# Altium PCB Thermistors Board V2.PcbDoc
Units mm, origin at the board's own origin, x right, y up, seen from the top; angles counter-clockwise.
Board outline 83.25 x 83.25 mm, 2 copper layers (Top Layer, Bottom Layer); 72 components, 65 nets, 212 pads, 0 vias.
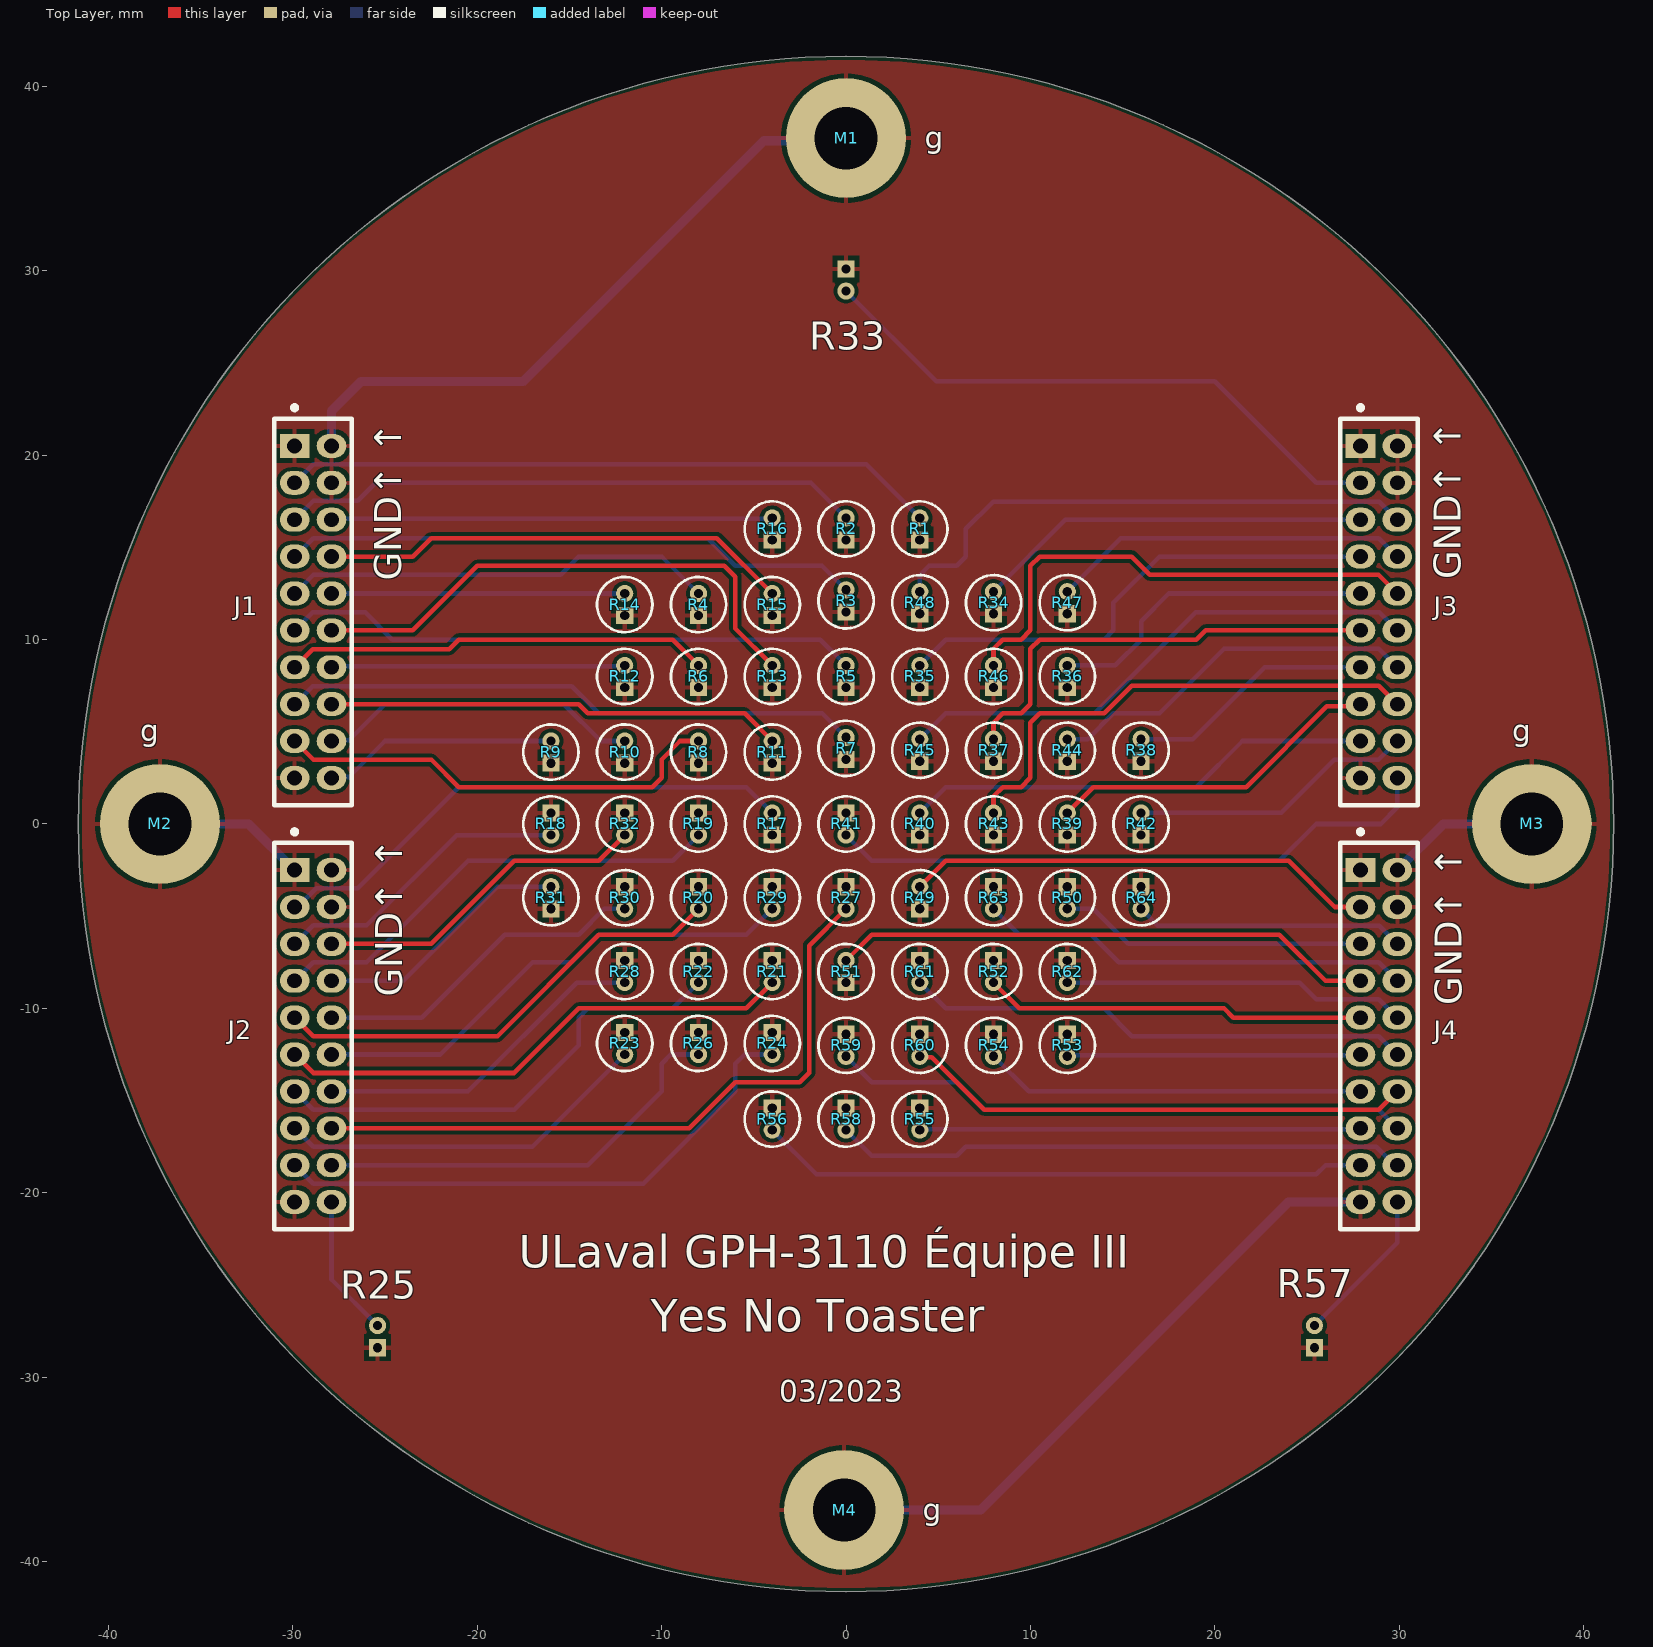
[diagram p0: Top Layer view]
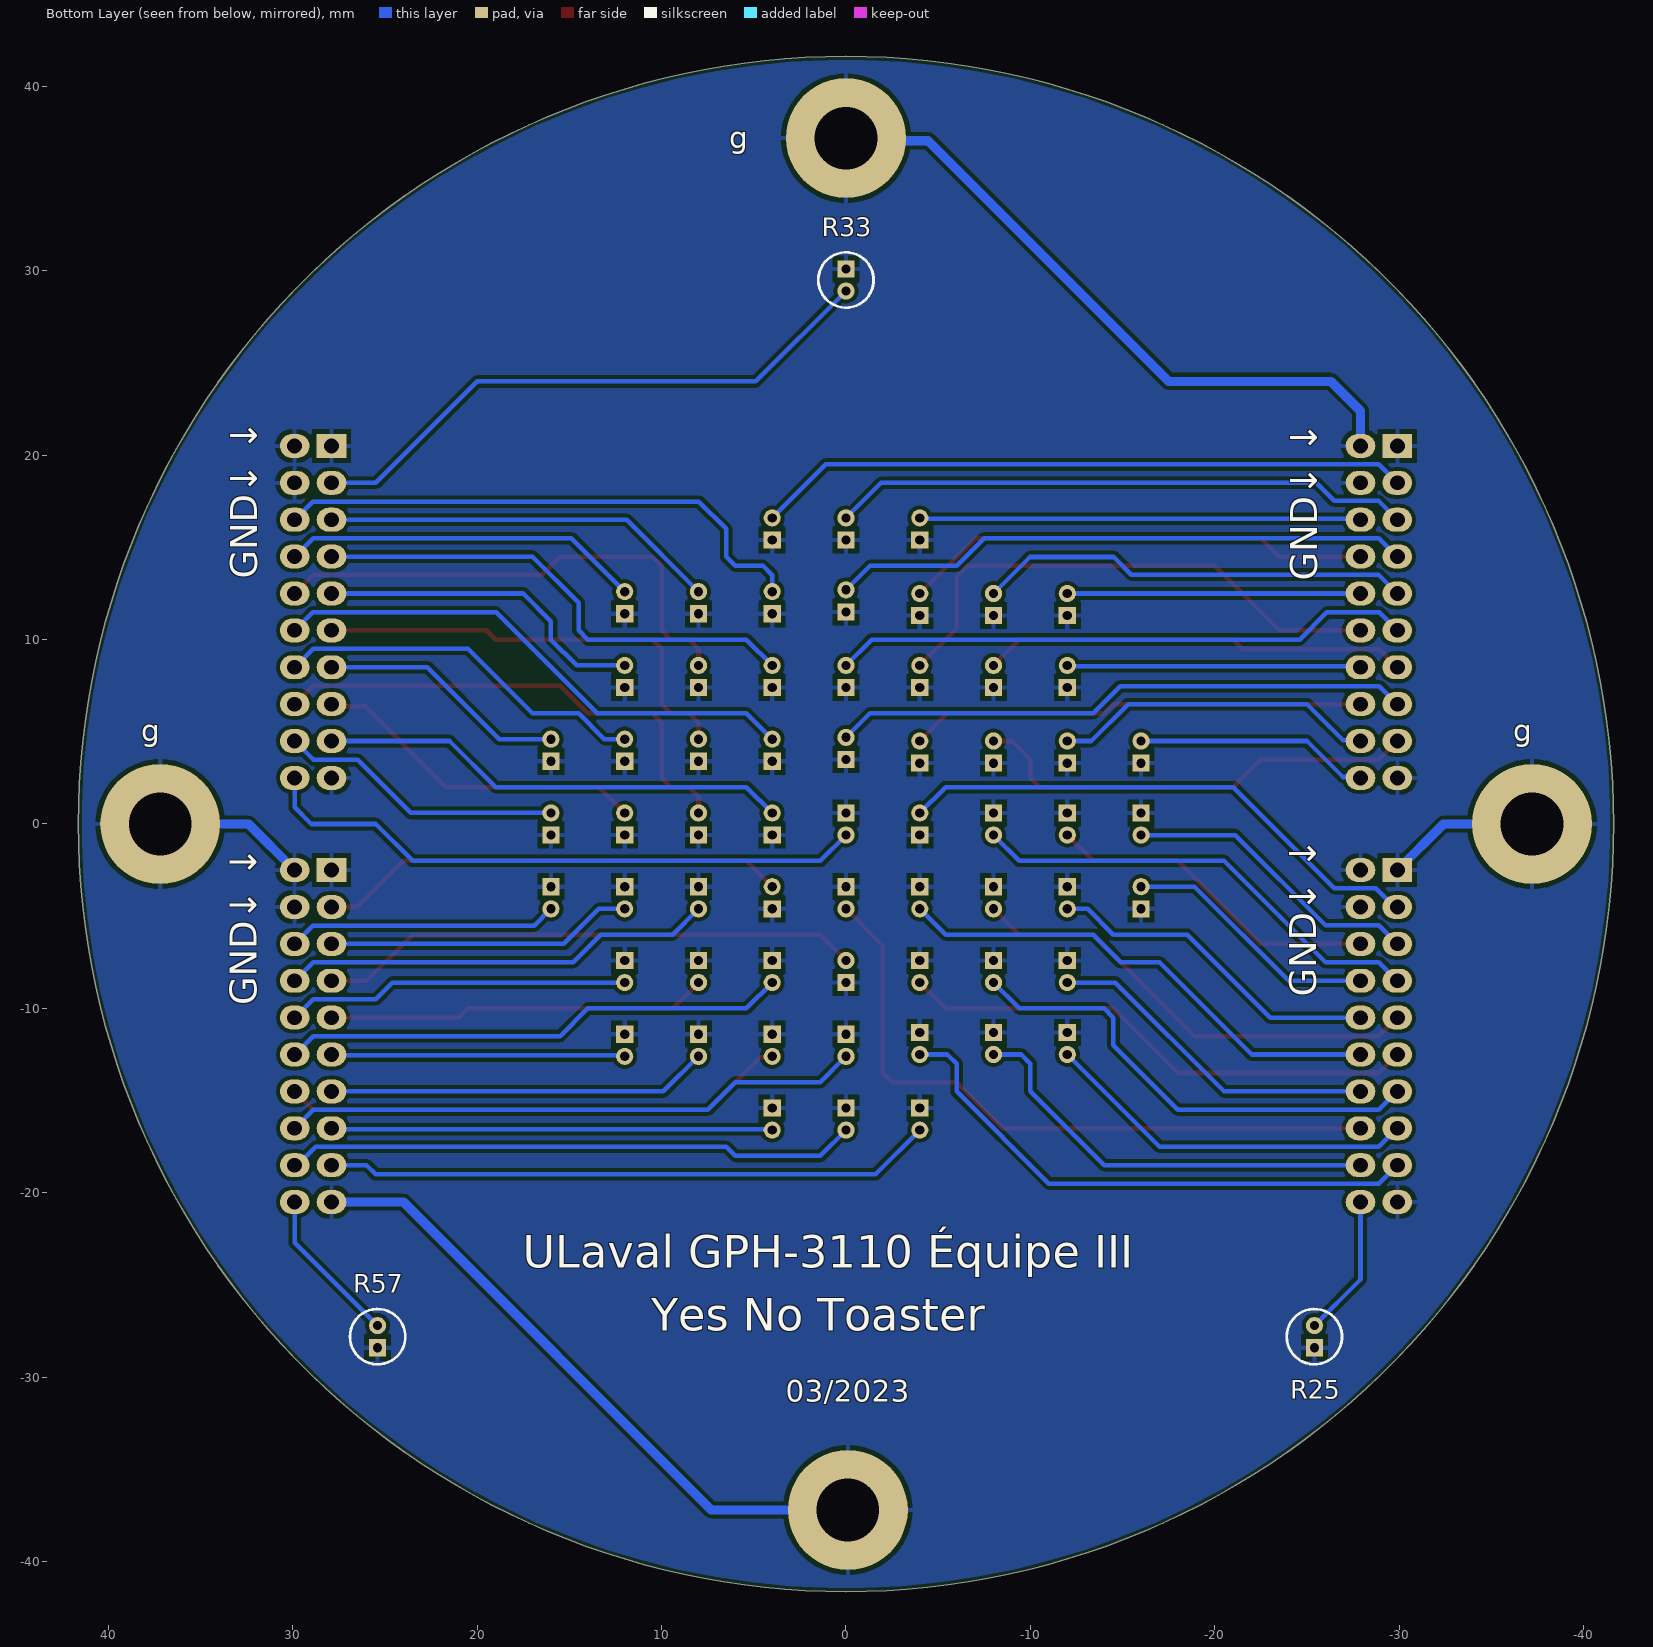
[diagram p1: Bottom Layer view, seen from below]
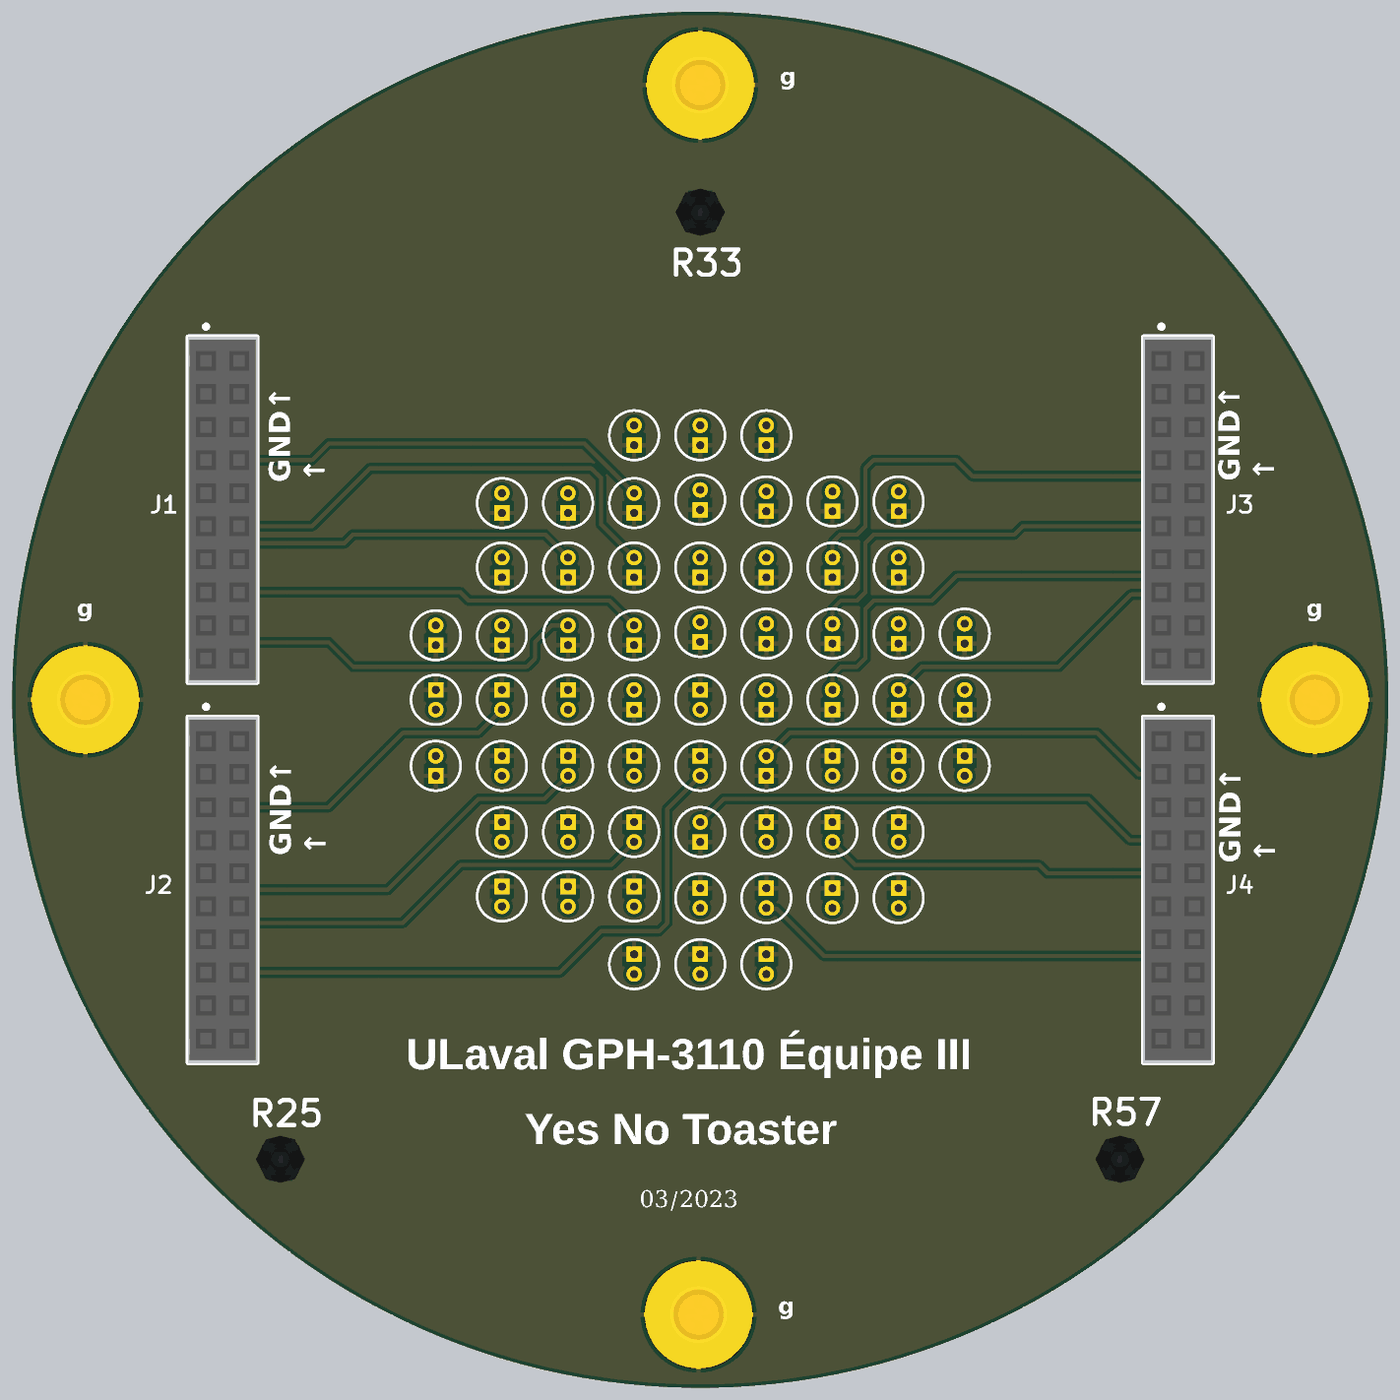
[diagram p2: 3D render of the assembled board from above, using the file's embedded part models]
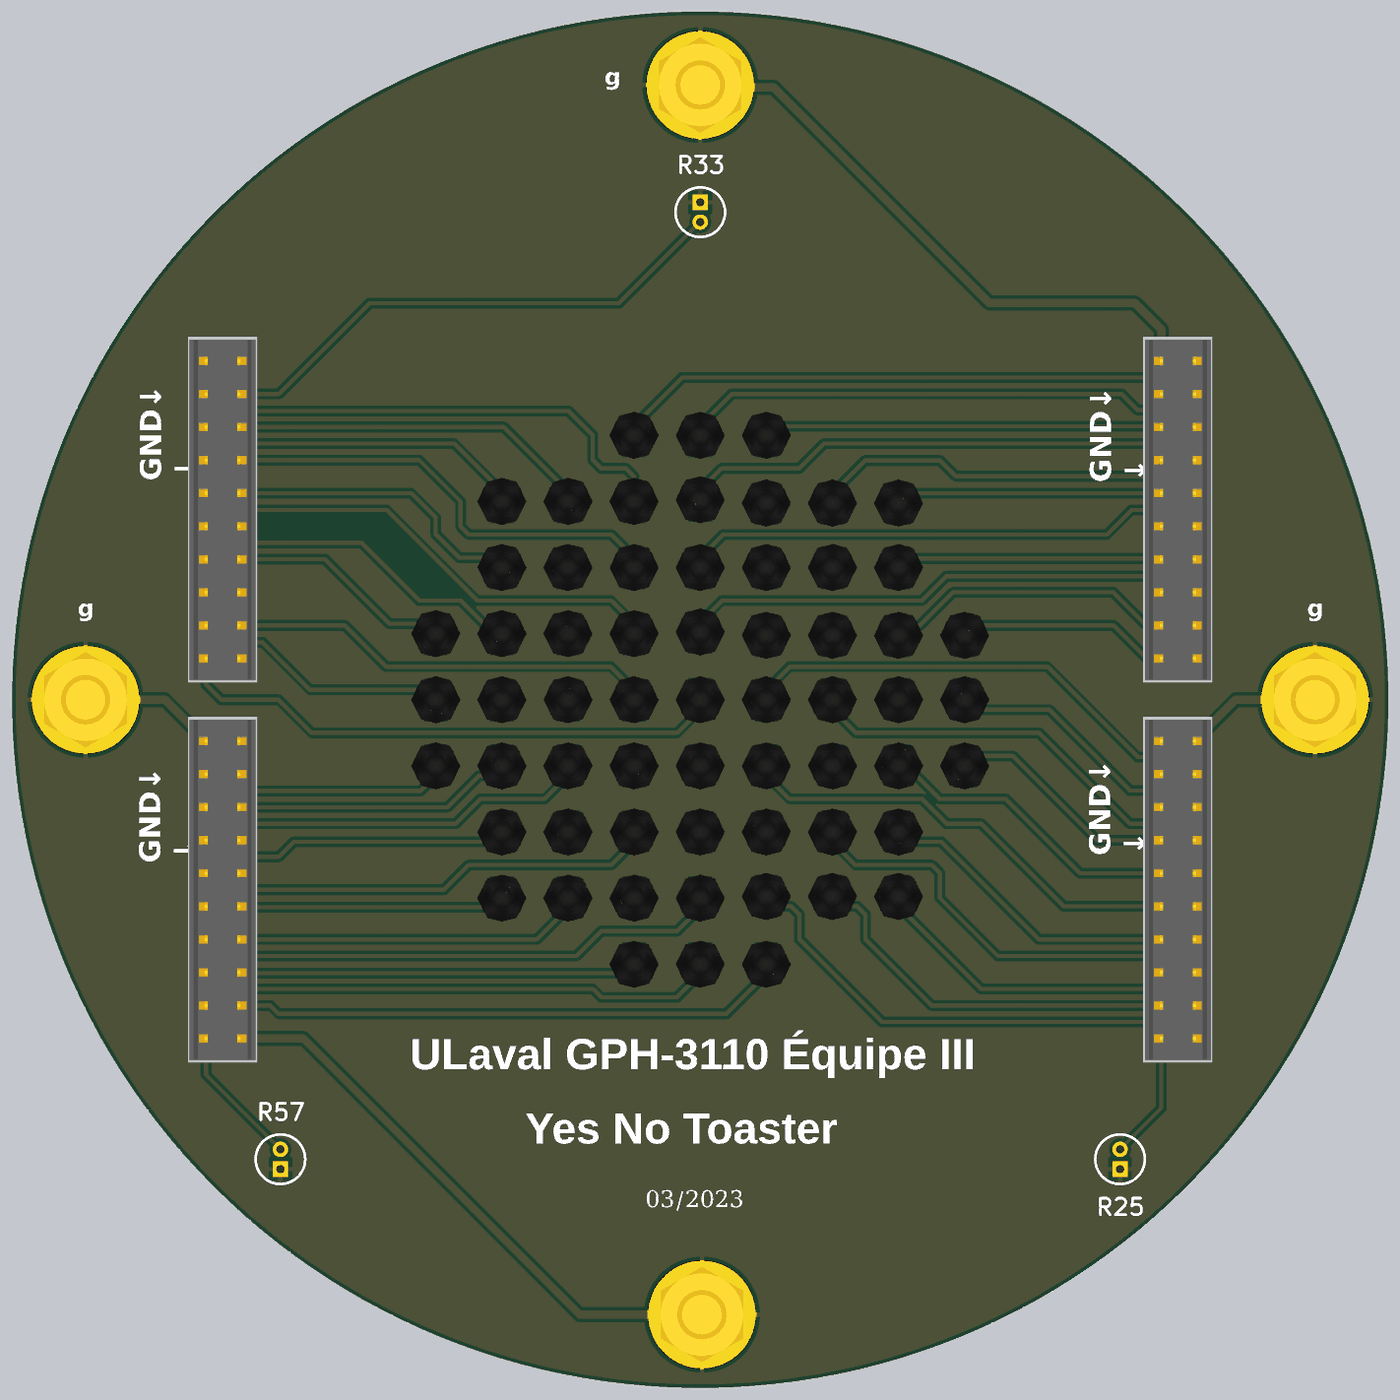
[diagram p3: 3D render of the assembled board from below, using the file's embedded part models]

## Layer stack, top to bottom
Top Solder: solder mask 0.0102, Solder Resist, Dk 3.5
Top Layer: signal copper 0.0356
Dielectric 1: dielectric 0.32, FR-4, Dk 4.8
Bottom Layer: signal copper 0.0356
Bottom Solder: solder mask 0.0102, Solder Resist, Dk 3.5

## Board outline
-41.625,0 ccw(c0,0) 0,-41.625 ccw(c0,0) 41.625,0 ccw(c0,0) 0,41.625 ccw(c0,0)

## Design rules (kind name [scope] priority, off if disabled: settings)
BoardOutlineClearance [All] p1: gap=0.2 ignorepadtopadclearanceinfootprint=FALSE
Clearance [All] p1: gap=0.2 ignorepadtopadclearanceinfootprint=TRUE except(0.09: Arc-Arc Arc-Track Track-Track; 0.127: SMDPad-SMDPad)
HoleSize [All] p1: absolutevalues=TRUE maxlimit=6.3 minlimit=0.2 maxpercent=80.000 minpercent=20.000
HoleToHoleClearance [All] p1: gap=0.5 allowstackedmicrovias=TRUE
MinimumAnnularRing [All] p1: minimumring=0.13
MinimumSolderMaskSliver [All] p1: minsoldermaskwidth=0.2
PolygonConnect [All] p1: connectstyle=Relief reliefconductorwidth=0.254 reliefentries=4 polygonreliefangle="90 Angle" airgapwidth=0.254
RoutingVias [All] p1: holewidth=0.5 width=0.9 viastyle="Through Hole" minholewidth=0.2 minwidth=0.5 maxholewidth=0.3 maxwidth=0.7
SilkToSilkClearance [All] p1: silktosilkclearance=0.05
SilkToSolderMaskClearance [IsPad] p1: minsilkscreentomaskgap=0.05 clearancetoexposedcopper=FALSE
SolderMaskExpansion [All] p1: expansion=0.05 istentingtop=FALSE
UnRoutedNet [All] p1: checkbadconnections=TRUE
Width [All] p1: maxlimit=1 minlimit=0.2 preferedwidth=0.3
24 further rules are at their usual default settings.

## Components (designator, comment, footprint, x,y, rotation, side; value= is the part's Value field where it differs from the comment)
J1 "NPPN102AFCN-RC" "Header Connector 20 Pos 0.079\" (2.00mm) - A" -28.9,11.5 r270 top
J2 "NPPN102AFCN-RC" "Header Connector 20 Pos 0.079\" (2.00mm) - A" -28.9,-11.5 r270 top
J3 "NPPN102AFCN-RC" "Header Connector 20 Pos 0.079\" (2.00mm) - A" 28.9,11.5 r270 top
J4 "NPPN102AFCN-RC" "Header Connector 20 Pos 0.079\" (2.00mm) - A" 28.9,-11.5 r270 top
M1 "971050354" "Standoff M3 5mm Brass" 0,37.193 r0 top
M2 "971050354" "Standoff M3 5mm Brass" -37.2,0 r0 top
M3 "971050354" "Standoff M3 5mm Brass" 37.19,0 r0 top
M4 "971050354" "Standoff M3 5mm Brass" -0.1,-37.2 r0 top
R1 "NTCLE413E2103F524A" "Thermistors NTC 10K 1% Bead - A" 4,16 r90 top value=10K
R2 "NTCLE413E2103F524A" "Thermistors NTC 10K 1% Bead - A" 0,16 r90 top
R3 "NTCLE413E2103F524A" "Thermistors NTC 10K 1% Bead - A" 0,12.1 r90 top value=10K
R4 "NTCLE413E2103F524A" "Thermistors NTC 10K 1% Bead - A" -8,11.9 r90 top value=10K
R5 "NTCLE413E2103F524A" "Thermistors NTC 10K 1% Bead - A" 0,8 r90 top value=10K
R6 "NTCLE413E2103F524A" "Thermistors NTC 10K 1% Bead - A" -8,8 r90 top value=10K
R7 "NTCLE413E2103F524A" "Thermistors NTC 10K 1% Bead - A" 0,4.1 r90 top value=10K
R8 "NTCLE413E2103F524A" "Thermistors NTC 10K 1% Bead - A" -8,3.9 r90 top value=10K
R9 "NTCLE413E2103F524A" "Thermistors NTC 10K 1% Bead - A" -16,3.9 r90 top value=10K
R10 "NTCLE413E2103F524A" "Thermistors NTC 10K 1% Bead - A" -12,3.9 r90 top value=10K
R11 "NTCLE413E2103F524A" "Thermistors NTC 10K 1% Bead - A" -4,3.9 r90 top value=10K
R12 "NTCLE413E2103F524A" "Thermistors NTC 10K 1% Bead - A" -12,8 r90 top value=10K
R13 "NTCLE413E2103F524A" "Thermistors NTC 10K 1% Bead - A" -4,8 r90 top value=10K
R14 "NTCLE413E2103F524A" "Thermistors NTC 10K 1% Bead - A" -12,11.9 r90 top value=10K
R15 "NTCLE413E2103F524A" "Thermistors NTC 10K 1% Bead - A" -4,11.9 r90 top
R16 "NTCLE413E2103F524A" "Thermistors NTC 10K 1% Bead - A" -4,16 r90 top value=10K
R17 "NTCLE413E2103F524A" "Thermistors NTC 10K 1% Bead - A" -4,0 r90 top value=10K
R18 "NTCLE413E2103F524A" "Thermistors NTC 10K 1% Bead - A" -16,0 r270 top
R19 "NTCLE413E2103F524A" "Thermistors NTC 10K 1% Bead - A" -8,0 r270 top value=10K
R20 "NTCLE413E2103F524A" "Thermistors NTC 10K 1% Bead - A" -8,-4 r270 top value=10K
R21 "NTCLE413E2103F524A" "Thermistors NTC 10K 1% Bead - A" -4,-8 r270 top value=10K
R22 "NTCLE413E2103F524A" "Thermistors NTC 10K 1% Bead - A" -8,-8 r270 top value=10K
R23 "NTCLE413E2103F524A" "Thermistors NTC 10K 1% Bead - A" -12,-11.9 r270 top value=10K
R24 "NTCLE413E2103F524A" "Thermistors NTC 10K 1% Bead - A" -4,-11.9 r270 top value=10K
R25 "NTCLE413E2103F524A" "Thermistors NTC 10K 1% Bead - A" -25.4,-27.8 r90 bottom value=10K
R26 "NTCLE413E2103F524A" "Thermistors NTC 10K 1% Bead - A" -8,-11.9 r270 top value=10K
R27 "NTCLE413E2103F524A" "Thermistors NTC 10K 1% Bead - A" 0,-4 r270 top value=10K
R28 "NTCLE413E2103F524A" "Thermistors NTC 10K 1% Bead - A" -12,-8 r270 top value=10K
R29 "NTCLE413E2103F524A" "Thermistors NTC 10K 1% Bead - A" -4,-4 r270 top value=10K
R30 "NTCLE413E2103F524A" "Thermistors NTC 10K 1% Bead - A" -12,-4 r270 top value=10K
R31 "NTCLE413E2103F524A" "Thermistors NTC 10K 1% Bead - A" -16,-4 r90 top
R32 "NTCLE413E2103F524A" "Thermistors NTC 10K 1% Bead - A" -12,0 r270 top value=10K
R33 "NTCLE413E2103F524A" "Thermistors NTC 10K 1% Bead - A" 0,29.5 r270 bottom value=10K
R34 "NTCLE413E2103F524A" "Thermistors NTC 10K 1% Bead - A" 8,12 r90 top
R35 "NTCLE413E2103F524A" "Thermistors NTC 10K 1% Bead - A" 4,8 r90 top value=10K
R36 "NTCLE413E2103F524A" "Thermistors NTC 10K 1% Bead - A" 12,8 r90 top value=10K
R37 "NTCLE413E2103F524A" "Thermistors NTC 10K 1% Bead - A" 8,4 r90 top value=10K
R38 "NTCLE413E2103F524A" "Thermistors NTC 10K 1% Bead - A" 16,4 r90 top value=10K
R39 "NTCLE413E2103F524A" "Thermistors NTC 10K 1% Bead - A" 12,0 r90 top value=10K
R40 "NTCLE413E2103F524A" "Thermistors NTC 10K 1% Bead - A" 4,0 r90 top value=10K
R41 "NTCLE413E2103F524A" "Thermistors NTC 10K 1% Bead - A" 0,0 r270 top value=10K
R42 "NTCLE413E2103F524A" "Thermistors NTC 10K 1% Bead - A" 16,0 r90 top value=10K
R43 "NTCLE413E2103F524A" "Thermistors NTC 10K 1% Bead - A" 8,0 r90 top value=10K
R44 "NTCLE413E2103F524A" "Thermistors NTC 10K 1% Bead - A" 12,4 r90 top value=10K
R45 "NTCLE413E2103F524A" "Thermistors NTC 10K 1% Bead - A" 4,4 r90 top value=10K
R46 "NTCLE413E2103F524A" "Thermistors NTC 10K 1% Bead - A" 8,8 r90 top value=10K
R47 "NTCLE413E2103F524A" "Thermistors NTC 10K 1% Bead - A" 12,12 r90 top
R48 "NTCLE413E2103F524A" "Thermistors NTC 10K 1% Bead - A" 4,12 r90 top value=10K
R49 "NTCLE413E2103F524A" "Thermistors NTC 10K 1% Bead - A" 4,-4 r90 top value=10K
R50 "NTCLE413E2103F524A" "Thermistors NTC 10K 1% Bead - A" 12,-4 r270 top
R51 "NTCLE413E2103F524A" "Thermistors NTC 10K 1% Bead - A" 0,-8 r90 top value=10K
R52 "NTCLE413E2103F524A" "Thermistors NTC 10K 1% Bead - A" 8,-8 r270 top value=10K
R53 "NTCLE413E2103F524A" "Thermistors NTC 10K 1% Bead - A" 12,-12 r270 top value=10K
R54 "NTCLE413E2103F524A" "Thermistors NTC 10K 1% Bead - A" 8,-12 r270 top value=10K
R55 "NTCLE413E2103F524A" "Thermistors NTC 10K 1% Bead - A" 4,-16 r270 top value=10K
R56 "NTCLE413E2103F524A" "Thermistors NTC 10K 1% Bead - A" -4,-16 r270 top value=10K
R57 "NTCLE413E2103F524A" "Thermistors NTC 10K 1% Bead - A" 25.4,-27.8 r90 bottom value=10K
R58 "NTCLE413E2103F524A" "Thermistors NTC 10K 1% Bead - A" 0,-16 r270 top value=10K
R59 "NTCLE413E2103F524A" "Thermistors NTC 10K 1% Bead - A" 0,-12 r270 top value=10K
R60 "NTCLE413E2103F524A" "Thermistors NTC 10K 1% Bead - A" 4,-12 r270 top value=10K
R61 "NTCLE413E2103F524A" "Thermistors NTC 10K 1% Bead - A" 4,-8 r270 top value=10K
R62 "NTCLE413E2103F524A" "Thermistors NTC 10K 1% Bead - A" 12,-8 r270 top value=10K
R63 "NTCLE413E2103F524A" "Thermistors NTC 10K 1% Bead - A" 8,-4 r270 top
R64 "NTCLE413E2103F524A" "Thermistors NTC 10K 1% Bead - A" 16,-4 r270 top value=10K

## Footprints (in the part's own frame and the unit in brackets; to place one, negate y for a bottom-side part, rotate by r counter-clockwise, add the part's x,y. Pads: shape width x height; smd on the part's side, far side on the other; paste and mask are expansions set on the pad)
"Header Connector 20 Pos 0.079\" (2.00mm) - A" [mm] "20 Position Header Connector 0.079\" (2.00mm) Through Hole Gold"
  rect 1.3x1.6 hole 0.8 paste-1000 mask+0: 1(-9,-1)
  oval 1.3x1.6 hole 0.8 paste-1000 mask+0: 2(-7,-1) 3(-5,-1) 4(-3,-1) 5(-1,-1) 6(1,-1) 7(3,-1) 8(5,-1) 9(7,-1) 10(9,-1) 11(9,1) 12(7,1) 13(5,1) 14(3,1) 15(1,1) 16(-1,1) 17(-3,1) 18(-5,1) 19(-7,1) 20(-9,1)
  silkscreen extent -11.2,-2.1 10.48,2.1, body extent -10.58,-2.2 10.58,2.2, height 0.25
"Standoff M3 5mm Brass" [mm] "Hex Standoff Threaded M3 Brass 0.197\" (5.00mm) Silver"
  round 6.5 hole 3.4: 1(0,0)
  body extent -2.5,-2.89 2.5,2.89
"Thermistors NTC 10K 1% Bead - A" [mm] "NTC Thermistor 10k Bead, Epoxy"
  rect 0.93x0.93 hole 0.5 paste-1000 mask+0: 1(-0.6,0)
  round 0.93 hole 0.5 paste-1000 mask+0: 2(0.6,0)
  silkscreen extent -1.5,-1.5 1.5,1.5, body extent -1.48,-1.5 1.48,1.5, height 1

## Part data
J1 J2 J3 J4: library part "Header Connector 20 Pos 0.079\" (2.00mm)", "20 Position Header Connector 0.079\" (2.00mm) Through Hole Gold", Supplier Part Number 1=S5750-10-ND, Supplier 1=Digi-Key
M1 M2 M3 M4: library part "Standoff M3 5mm", "Hex Standoff Threaded M3 Brass 0.197\" (5.00mm) Silver", Supplier Part Number 1=732-12899-ND, Supplier 1=Digi-Key
R1 R2 R3 R4 R5 R6 R7 R8 R9 R10 R11 R12 R13 R14 R15 R16 R17 R18 R19 R20 R21 R22 R23 R24 R25 R26 R27 R28 R29 R30 R31 R32 R33 R34 R35 R36 R37 R38 R39 R40 R41 R42 R43 R44 R45 R46 R47 R48 R49 R50 R51 R52 R53 R54 R55 R56 R57 R58 R59 R60 R61 R62 R63 R64: library part "Thermistors NTC 10K 1% Bead", "NTC Thermistor 10k Bead, Epoxy", Supplier Part Number 1=56-NTCLE413E2103F524A-ND, ComponentLink1Description=Datasheet, ComponentLink1URL=https://www.vishay.com/docs/29078/ntcle413.pdf, Supplier 1=Digi-Key

## Nets (pads, with @x,y where several pads share a name; then routed paths per layer and width w, separated by ;. In a path a pad name is that pad's centre, name@x,y a point inside that pad or via, vN(x,y) a via of type N, cw(c..) or ccw(c..) an arc to the next point about the centre after c; other vN are vias at no path point)
A1: J1.2 R1.2 | length 35.5
  Bottom Layer w0.25: J1.2 -28.9,19.5 1.1,19.5 R1.2
A2: J1.3 R2.2 | length 31.5
  Bottom Layer w0.25: J1.3 -28.875,17.525 -26.475,17.525 -25.5,18.5 -1.9,18.5 R2.2
A3: J1.4 R3.2 | length 31.5
  Bottom Layer w0.25: J1.4 -28.9,15.5 -7.5,15.5 -6,14 -1.3,14 R3.2
A4: J1.5 R4.2 | length 23.5
  Bottom Layer w0.25: J1.5 -28.875,13.525 -15.475,13.525 -14.524,14.476 -9.976,14.476 R4.2
A5: J1.6 R5.2 | length 31.5
  Bottom Layer w0.25: J1.6 -28.925,11.475 -26.075,11.475 -24.6,10 -1.4,10 R5.2
A6: J1.7 R6.2 | length 23.1
  Top Layer w0.25: J1.7 -28.925,9.475 -21.525,9.475 -21,10 -9.4,10 R6.2
A7: J1.8 R7.2 | length 31.5
  Bottom Layer w0.25: J1.8 -28.925,7.475 -14.875,7.475 -13.4,6 -1.3,6 R7.2
A8: J1.9 R8.2 | length 24.6
  Top Layer w0.25: J1.9 -28.875,3.475 -22.475,3.475 -21,2 -10.5,2 -10,2.5 -10,3.5 -9,4.5 R8.2
A10: J1.11 R9.2 | length 12.7
  Bottom Layer w0.25: J1.11 -27.85,2.55 -26.95,2.55 -25,4.5 R9.2
A11: J1.12 R10.2 | length 17.6
  Bottom Layer w0.25: J1.12 -27.85,4.55 -26.95,4.55 -25,6.5 -15.3,6.5 -13.3,4.5 R10.2
A12: J1.13 R11.2 | length 24.7
  Top Layer w0.25: J1.13 -14.5,6.5 -14,6 -5.5,6 R11.2
A13: J1.14 R12.2 | length 15.9
  Bottom Layer w0.25: J1.14 -27.85,8.55 -12.05,8.55 R12.2
A14: J1.15 R13.2 | length 29.2
  Top Layer w0.25: J1.15 -23.5,10.5 -20,14 -6.6,14 -6,13.4 -6,10.6 R13.2
A15: J1.16 R14.2 | length 15.9
  Bottom Layer w0.25: J1.16 R14.2
A16: J1.17 R15.2 | length 25.6
  Top Layer w0.25: J1.17 -23.5,14.5 -22.5,15.5 -7,15.5 R15.2
A17: J1.18 R16.2 | length 23.9
  Bottom Layer w0.25: J1.18 -27.85,16.55 -4.05,16.55 R16.2
B1: J2.2 R17.2 | length 29.2
  Bottom Layer w0.25: J2.2 -29.75,-4.5 -28.725,-3.475 -26.475,-3.475 -21,2 -5.4,2 R17.2
B2: J2.3 R18.2 | length 16.3
  Bottom Layer w0.25: J2.3 -28.9,-5.5 -26,-5.5 -21.1,-0.6 R18.2
B3: J2.4 R19.2 | length 25.2
  Bottom Layer w0.25: J2.4 -28.9,-7.5 -26,-7.5 -20.5,-2 -9.4,-2 R19.2
B4: J2.5 R20.2 | length 25.2
  Top Layer w0.25: J2.5 -28.9,-11.5 -18.9,-11.5 -13.4,-6 -9.4,-6 R20.2
B5: J2.6 R21.2 | length 28.3
  Top Layer w0.25: J2.6 -28.9,-13.5 -18,-13.5 -14.5,-10 -5.4,-10 R21.2
B6: J2.7 R22.2 | length 26.1
  Bottom Layer w0.25: J2.7 -28.9,-15.5 -18,-15.5 -14.5,-12 -14.5,-10.5 -14,-10 -9.4,-10 R22.2
B7: J2.8 R23.2 | length 20.4
  Bottom Layer w0.25: J2.8 -28.9,-17.5 -17,-17.5 R23.2
B8: J2.9 R24.2 | length 30.1
  Bottom Layer w0.25: J2.9 -28.9,-19.5 -11,-19.5 -6,-14.5 -6,-13 -5.5,-12.5 R24.2
B10: J2.11 R25.2 | length 7.7
  Bottom Layer w0.25: J2.11 -27.9,-24.7 R25.2
B11: J2.12 R26.2 | length 23.3
  Bottom Layer w0.25: J2.12 -14,-18.5 -10,-14.5 -10,-13 -9.5,-12.5 R26.2
B12: J2.13 R27.2 | length 36.9
  Top Layer w0.25: J2.13 -8.5,-16.5 -6,-14 -2.5,-14 -2,-13.5 -2,-6.6 R27.2
B13: J2.14 R28.2 | length 18.3
  Bottom Layer w0.25: J2.14 -20.5,-14.5 -14.6,-8.6 R28.2
B14: J2.15 R29.2 | length 27.2
  Bottom Layer w0.25: J2.15 -22,-12.5 -17,-7.5 -14.9,-7.5 -13.4,-6 -5.4,-6 R29.2
B15: J2.16 R30.2 | length 18.3
  Bottom Layer w0.25: J2.16 -23,-10.5 -18.5,-6 -14.5,-6 -13.1,-4.6 R30.2
B16: J2.17 R31.2 | length 14
  Bottom Layer w0.25: J2.17 -24,-8.5 -18.9,-3.4 R31.2
B17: J2.18 R32.2 | length 18.3
  Top Layer w0.25: J2.18 -22.5,-6.5 -18,-2 -13.4,-2 R32.2
C1: J3.2 R33.2 | length 32.2
  Bottom Layer w0.25: R33.2 4.9,24 20,24 25.5,18.5 J3.2
C2: J3.3 R34.2 | length 21.5
  Bottom Layer w0.25: R34.2 11.9,16.5 J3.3
C3: J3.4 R35.2 | length 27.2
  Bottom Layer w0.25: R35.2 5.4,10 14,10 14.5,10.5 14.5,12 17,14.5 J3.4
C4: J3.5 R36.2 | length 18.1
  Bottom Layer w0.25: R36.2 14.6,8.6 16,10 16,11 17.5,12.5 J3.5
C5: J3.6 R37.2 | length 24.6
  Top Layer w0.25: R37.2 8,5.5 8.5,6 9.5,6 10,6.5 10,9.5 10.5,10 19,10 19.5,10.5 J3.6
C6: J3.7 R38.2 | length 13.5
  Bottom Layer w0.25: R38.2 18.8,4.6 22.7,8.5 J3.7
C7: J3.8 R39.2 | length 18.3
  Top Layer w0.25: R39.2 13.4,2 21.7,2 26.075,6.375 27.775,6.375 J3.8
C8: J3.9 R40.2 | length 25.5
  Bottom Layer w0.25: R40.2 5.4,2 19,2 21.5,4.5 J3.9
C10: J3.11 R41.2 | length 33.3
  Bottom Layer w0.25: R41.2 1.4,-2 23.5,-2 25.5,0 29,0 29.9,0.9 J3.11
C11: J3.12 R42.2 | length 15.5
  Bottom Layer w0.25: R42.2 23.6,0.6 26.475,3.475 28.875,3.475 J3.12
C12: J3.13 R43.2 | length 27.5
  Top Layer w0.25: R43.2 8,1.5 8.5,2 9.5,2 10,2.5 10,5.5 10.5,6 14,6 15.5,7.5 28.9,7.5 J3.13
C13: J3.14 R44.2 | length 20.3
  Bottom Layer w0.25: R44.2 13.1,4.6 14.5,6 17,6 20.5,9.5 28.9,9.5 J3.14
C14: J3.15 R45.2 | length 29.2
  Bottom Layer w0.25: R45.2 5.4,6 13.5,6 18.975,11.475 28.925,11.475 J3.15
C15: J3.16 R46.2 | length 27.7
  Top Layer w0.25: R46.2 8,9.5 8.5,10 9.5,10 10,10.5 10,14 10.5,14.5 15.5,14.5 16.475,13.525 28.875,13.525 J3.16
C16: J3.17 R47.2 | length 19.5
  Bottom Layer w0.25: R47.2 14.9,15.5 28.9,15.5 J3.17
C17: J3.18 R48.2 | length 29.7
  Bottom Layer w0.25: R48.2 4,13.5 4.5,14 6,14 6.5,14.5 6.5,16 7.975,17.475 28.925,17.475 J3.18
D1: J4.2 R49.2 | length 25.5
  Top Layer w0.25: R49.2 5.4,-2 24,-2 26.5,-4.5 J4.2
D2: J4.3 R50.2 | length 16.7
  Bottom Layer w0.25: R50.2 13.4,-4.6 15.3,-6.5 J4.3
D3: J4.4 R51.2 | length 29.5
  Top Layer w0.25: R51.2 1.4,-6 23.5,-6 26,-8.5 J4.4
D4: J4.5 R52.2 | length 20.7
  Top Layer w0.25: R52.2 9.4,-10 20.5,-10 21,-10.5 J4.5
D5: J4.6 R53.2 | length 15.9
  Bottom Layer w0.25: R53.2 12.05,-12.55 27.85,-12.55 J4.6
D6: J4.7 R54.2 | length 20.7
  Bottom Layer w0.25: R54.2 9.9,-14.5 J4.7
D7: J4.8 R55.2 | length 23.9
  Bottom Layer w0.25: R55.2 4.05,-16.55 27.85,-16.55 J4.8
D8: J4.9 R56.2 | length 33.1
  Bottom Layer w0.25: R56.2 -1.6,-19 25.5,-19 26,-18.5 J4.9
D10: J4.11 R57.2 | length 8.6
  Bottom Layer w0.25: R57.2 29.9,-22.7 J4.11
D11: J4.12 R58.2 | length 31.1
  Bottom Layer w0.25: R58.2 1.4,-18 6,-18 6.5,-17.5 28.75,-17.5 29.75,-18.5 J4.12
D12: J4.13 R59.2 | length 31.5
  Bottom Layer w0.25: R59.2 1.4,-14 6,-14 7.5,-15.5 28.9,-15.5 J4.13
D13: J4.14 R60.2 | length 27.5
  Top Layer w0.25: R60.2 4.041,-12.641 4.641,-12.641 7.5,-15.5 28.9,-15.5 J4.14
D14: J4.15 R61.2 | length 27.5
  Bottom Layer w0.25: R61.2 5.4,-10 14,-10 15.5,-11.5 28.9,-11.5 J4.15
D15: J4.16 R62.2 | length 18.7
  Bottom Layer w0.25: R62.2 24.6,-8.6 25.5,-9.5 28.9,-9.5 J4.16
D16: J4.17 R63.2 | length 23.5
  Bottom Layer w0.25: R63.2 9.4,-6 13.3,-6 14.8,-7.5 28.9,-7.5 J4.17
D17: J4.18 R64.2 | length 14.7
  Bottom Layer w0.25: R64.2 16.915,-5.515 28.915,-5.515 J4.18
GND: J1.1 J1.10 J1.19 J1.20 J2.1 J2.10 J2.19 J2.20 J3.1 J3.10 J3.19 J3.20 J4.1 J4.10 J4.19 J4.20 M1.1 M2.1 M3.1 M4.1 R1.1 R2.1 R3.1 R4.1 R5.1 R6.1 R7.1 R8.1 R9.1 R10.1 R11.1 R12.1 R13.1 R14.1 R15.1 R16.1 R17.1 R18.1 R19.1 R20.1 R21.1 R22.1 R23.1 R24.1 R25.1 R26.1 R27.1 R28.1 R29.1 R30.1 R31.1 R32.1 R33.1 R34.1 R35.1 R36.1 R37.1 R38.1 R39.1 R40.1 R41.1 R42.1 R43.1 R44.1 R45.1 R46.1 R47.1 R48.1 R49.1 R50.1 R51.1 R52.1 R53.1 R54.1 R55.1 R56.1 R57.1 R58.1 R59.1 R60.1 R61.1 R62.1 R63.1 R64.1 | length 87.5
  Bottom Layer w0.5: M2.1 -32.4,0 J2.1 ; J1.20 -27.9,22.4 -26.3,24 -17.5,24 -4.45,37.05 -0.143,37.05 M1.1 ; M4.1 7.3,-37.2 24,-20.5 J4.10 ; J4.20 32.4,0 M3.1

## Polygon pours and split planes (outlines as drawn)
GND on Top Layer "Top GND" (solid, remove dead copper, pour order 0): -41.625,0 ccw(c0,0) 0,-41.625 ccw(c0,0) 41.625,0 ccw(c0,0) 0,41.625 ccw(c0,0)
GND on Bottom Layer "Bottom GND" (solid, remove dead copper, pour order 1): -41.625,0 ccw(c0,0) 0,-41.625 ccw(c0,0) 41.625,0 ccw(c0,0) 0,41.625 ccw(c0,0)

## Silkscreen, mask and mechanical layers (free items; w line width, h text height)
Top Overlay:
  text "g" at 4.262,36.243 h2
  text "R33" at -1.996,25.704 h1.52
  text "GND↑ ↑" at 33.825,13.275 h2.5 r90
  text "GND↑ ↑" at -23.625,13.2 h2.5 r90
  text "g" at -38.262,4.075 h2
  text "g" at 36.128,4.075 h2
  text "GND↑ ↑" at -23.575,-9.375 h2.5 r90
  text "GND↑ ↑" at 33.875,-9.825 h2.5 r90
  text "ULaval GPH-3110 Équipe III" at -17.75,-24.65 h3
  text "R57" at 23.354,-25.671 h1.52
  text "R25" at -27.421,-25.746 h1.52
  text "Yes No Toaster" at -10.575,-28.125 h3
  text "03/2023" at -3.625,-31.75 h2
  text "g" at 4.163,-38.15 h2
Bottom Overlay:
  text "g" at 6.337,36.225 h2
  text "GND↓ ↓" at 31.425,13.3 h2.5 r270
  text "GND↓ ↓" at -26.05,13.2 h2.5 r270
  text "g" at -36.178,4.075 h2
  text "g" at 38.212,4.075 h2
  text "GND↓ ↓" at -26,-9.375 h2.5 r270
  text "GND↓ ↓" at 31.475,-9.825 h2.5 r270
  text "ULaval GPH-3110 Équipe III" at 17.525,-24.65 h3
  text "Yes No Toaster" at 10.55,-28.075 h3
  text "03/2023" at 3.275,-31.75 h2
Mechanical 1:
  circle w0.2: c0,0 r41.625